# EAGLE board WLR089U0_Base (EAGLE 9.5.0)
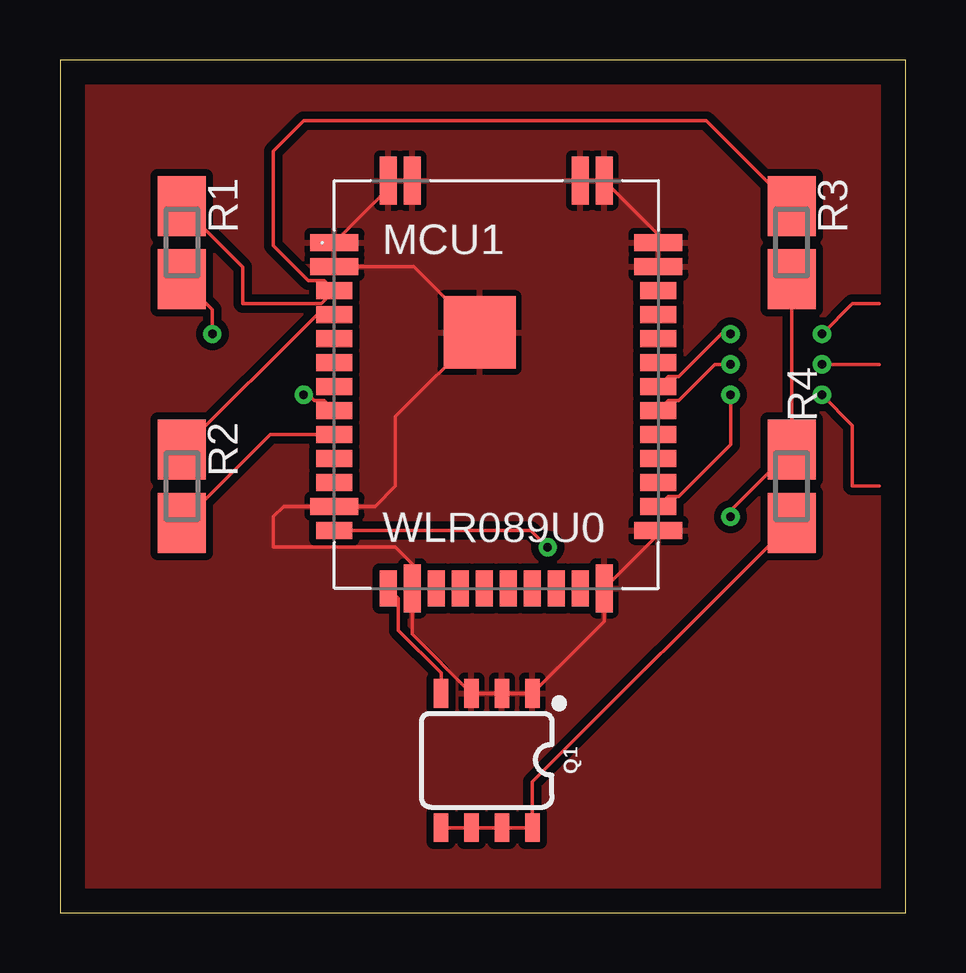
[diagram p0: board, top side]
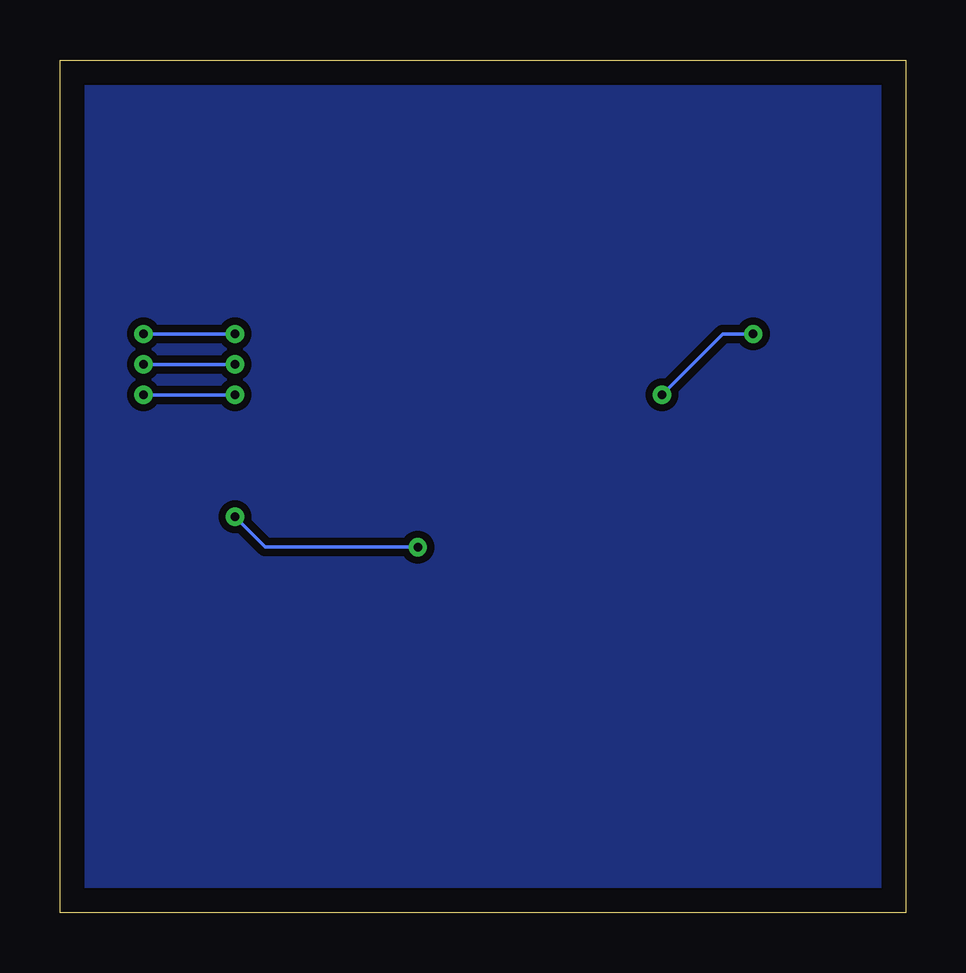
[diagram p1: board, bottom side, seen from below]

Size 35.23 x 35.55 mm. Coordinates in mm from the lower left corner, seen from the top.
Outline: 0,0 35.23,0 35.23,35.55 0,35.55 0,0
Copper layers (1*16): Top 0.035mm / dielectric 1.5mm / Bottom 0.035mm
Design rules "default": minimum track width 6mil, minimum drill 0.35mm, track to track 6mil, track to pad 6mil, pad to pad 6mil, via to via 6mil, smd to smd 6mil, copper to edge 40mil, drill to drill 6mil, minimum pad ring 10mil, minimum via ring 8mil, stop-mask expansion 4mil, vias tented up to drill 0mil, thermal gap 10mil

## Footprints (pad centres in the part's own frame; a part is rotated, then mirrored left to right if it is on the bottom)
WLR089U0 = smd 2 x 0.7: 1 0,0; 2 0,-1; 12 0,-11; 24 13.5,-12; 35 13.5,-1; 36 13.5,0 | smd 1.5 x 0.7: 3 0,-2; 4 0,-3; 5 0,-4; 6 0,-5; 7 0,-6; 8 0,-7; 9 0,-8; 10 0,-9; 11 0,-10; 13 0,-12; 25 13.5,-11; 26 13.5,-10; 27 13.5,-9; 28 13.5,-8; 29 13.5,-7; 30 13.5,-6; 31 13.5,-5; 32 13.5,-4; 33 13.5,-3; 34 13.5,-2 | smd 0.7 x 1.5: 14 2.25,-14.42; 16 4.25,-14.42; 17 5.25,-14.42; 18 6.25,-14.42; 19 7.25,-14.42; 20 8.25,-14.42; 21 9.25,-14.42; 22 10.25,-14.42 | smd 0.7 x 2: 15 3.25,-14.42; 23 11.25,-14.42; 37 11.25,2.58; 38 10.25,2.58; 39 3.25,2.58; 40 2.25,2.58 | smd 3 x 3.03: TPAD 6.05,-3.75
SO08 = smd 0.6 x 1.2: 1 -1.905,-2.8; 2 -0.635,-2.8; 3 0.635,-2.8; 4 1.905,-2.8; 5 1.905,2.8; 6 0.635,2.8; 7 -0.635,2.8; 8 -1.905,2.8
SMK = smd 2.5 x 2: 1 1.524,0; 2 -1.524,0

## Placement (x,y rotation side)
MCU1  WLR089U0  [WLR089U0]  11.43,27.94 0 top
Q1  6.5A/30V/38mΩ  [SO08]  17.78,6.35 180 top
R1  4.7k  [SMK]  5.08,27.94 270 top
R2  4.7k  [SMK]  5.08,17.78 270 top
R3  20Meg  [SMK]  30.48,27.94 270 top
R4  20Meg  [SMK]  30.48,17.78 270 top

## Library data of the parts
MCU1 = Personal
Q1 = SparkFun-DiscreteSemi; PROD_ID: TRANS-08089
R1-R4 = resistor-shunt; OC_FARNELL: unknown; OC_NEWARK: unknown

## Nets
GND: MCU1.1 MCU1.2 MCU1.12 MCU1.15 MCU1.23 MCU1.24 MCU1.35 MCU1.36 MCU1.37 MCU1.38 MCU1.39 MCU1.40 MCU1.TPAD Q1.1 Q1.2 Q1.3
N$1: MCU1.8 R1.1
N$2: MCU1.9 R2.1
N$3: MCU1.14 Q1.4
N$4: Q1.5 Q1.6 Q1.7 Q1.8 R4.1
N$6: MCU1.13 R3.1 R4.2
RESET: MCU1.25
SWDCLK: MCU1.30
SWDIO: MCU1.29
VCC: MCU1.3 MCU1.4 R1.2 R2.2 R3.2

## Tracks (layer width: path | path; a pad name or v marks a point on that pad's centre or on a via)
GND
  Top 0.152: MCU1.35 MCU1.36 24.93,28.27 MCU1.37 MCU1.38 MCU1.39 MCU1.40 13.68,30.19 MCU1.1 MCU1.2 14.73,26.94 MCU1.TPAD 13.97,20.68 13.97,17.78 13.13,16.94 MCU1.12 9.32,16.94 8.89,16.51 8.89,15.24 13.97,15.24 14.68,14.53 14.68,13.97 MCU1.15 14.68,11.62 Q1.3 Q1.2 Q1.1 22.68,12.14 MCU1.23 24.93,15.77 MCU1.24
  pour Top (isolate 0.305): 0,0 35.56,0 35.56,35.56 0,35.56
GND_BOTTOM
  pour Bottom (isolate 0.305): 0,0 35.56,0 35.56,35.56 0,35.56
N$1  (via drill 0.35)
  Top 0.152: R1.1 6.35,25.15 v6.35,24.13 | MCU1.8 11.01,21.36 10.59,21.36 10.36,21.59 v10.15,21.59
  Bottom 0.152: v6.35,24.13 7.61,24.13 v10.15,21.59
N$2
  Top 0.152: R2.1 8.76,19.94 MCU1.9
N$3
  Top 0.152: MCU1.14 14.1,13.1 14.1,11.76 15.88,9.99 Q1.4
N$4
  Top 0.152: R4.1 19.68,5.46 Q1.8 Q1.7 Q1.6 Q1.5
N$6  (via drill 0.35)
  Top 0.152: MCU1.13 19.62,15.94 v20.32,15.24 | v27.94,16.51 27.94,16.76 R4.2 R3.1
  Bottom 0.152: v20.32,15.24 26.67,15.24 v27.94,16.51
RESET  (via drill 0.35)
  Top 0.152: MCU1.25 25.35,17.36 25.77,17.36 27.94,19.53 v27.94,21.59 | v31.75,21.59 33.02,20.32 33.02,17.78 34.14,17.78
  Bottom 0.152: v27.94,21.59 v31.75,21.59
SWDCLK  (via drill 0.35)
  Top 0.152: MCU1.30 25.35,22.36 25.77,22.36 27.54,24.13 v27.94,24.13 | v31.75,24.13 33.02,25.4 34.14,25.4
  Bottom 0.152: v27.94,24.13 v31.75,24.13
SWDIO  (via drill 0.35)
  Top 0.152: MCU1.29 25.35,21.36 25.77,21.36 27.27,22.86 v27.94,22.86 | v31.75,22.86 34.14,22.86
  Bottom 0.152: v27.94,22.86 v31.75,22.86
VCC
  Top 0.152: R1.2 7.62,26.92 7.62,25.4 10.89,25.4 MCU1.3 | MCU1.3 11.01,26.36 10.34,26.36 8.89,27.81 8.89,31.75 10.16,33.02 26.92,33.02 R3.2 | R2.2 10.72,24.94 MCU1.4 MCU1.3